# Altium PCB PCB1.PcbDoc
Units mm, origin at the board's own origin, x right, y up, seen from the top; angles counter-clockwise.
Board outline 67.31 x 69.47 mm, 2 copper layers (Top Layer, Bottom Layer); 6 components, 12 nets, 63 pads, 3 vias.
Unrouted connection lines stored in the file: 7.
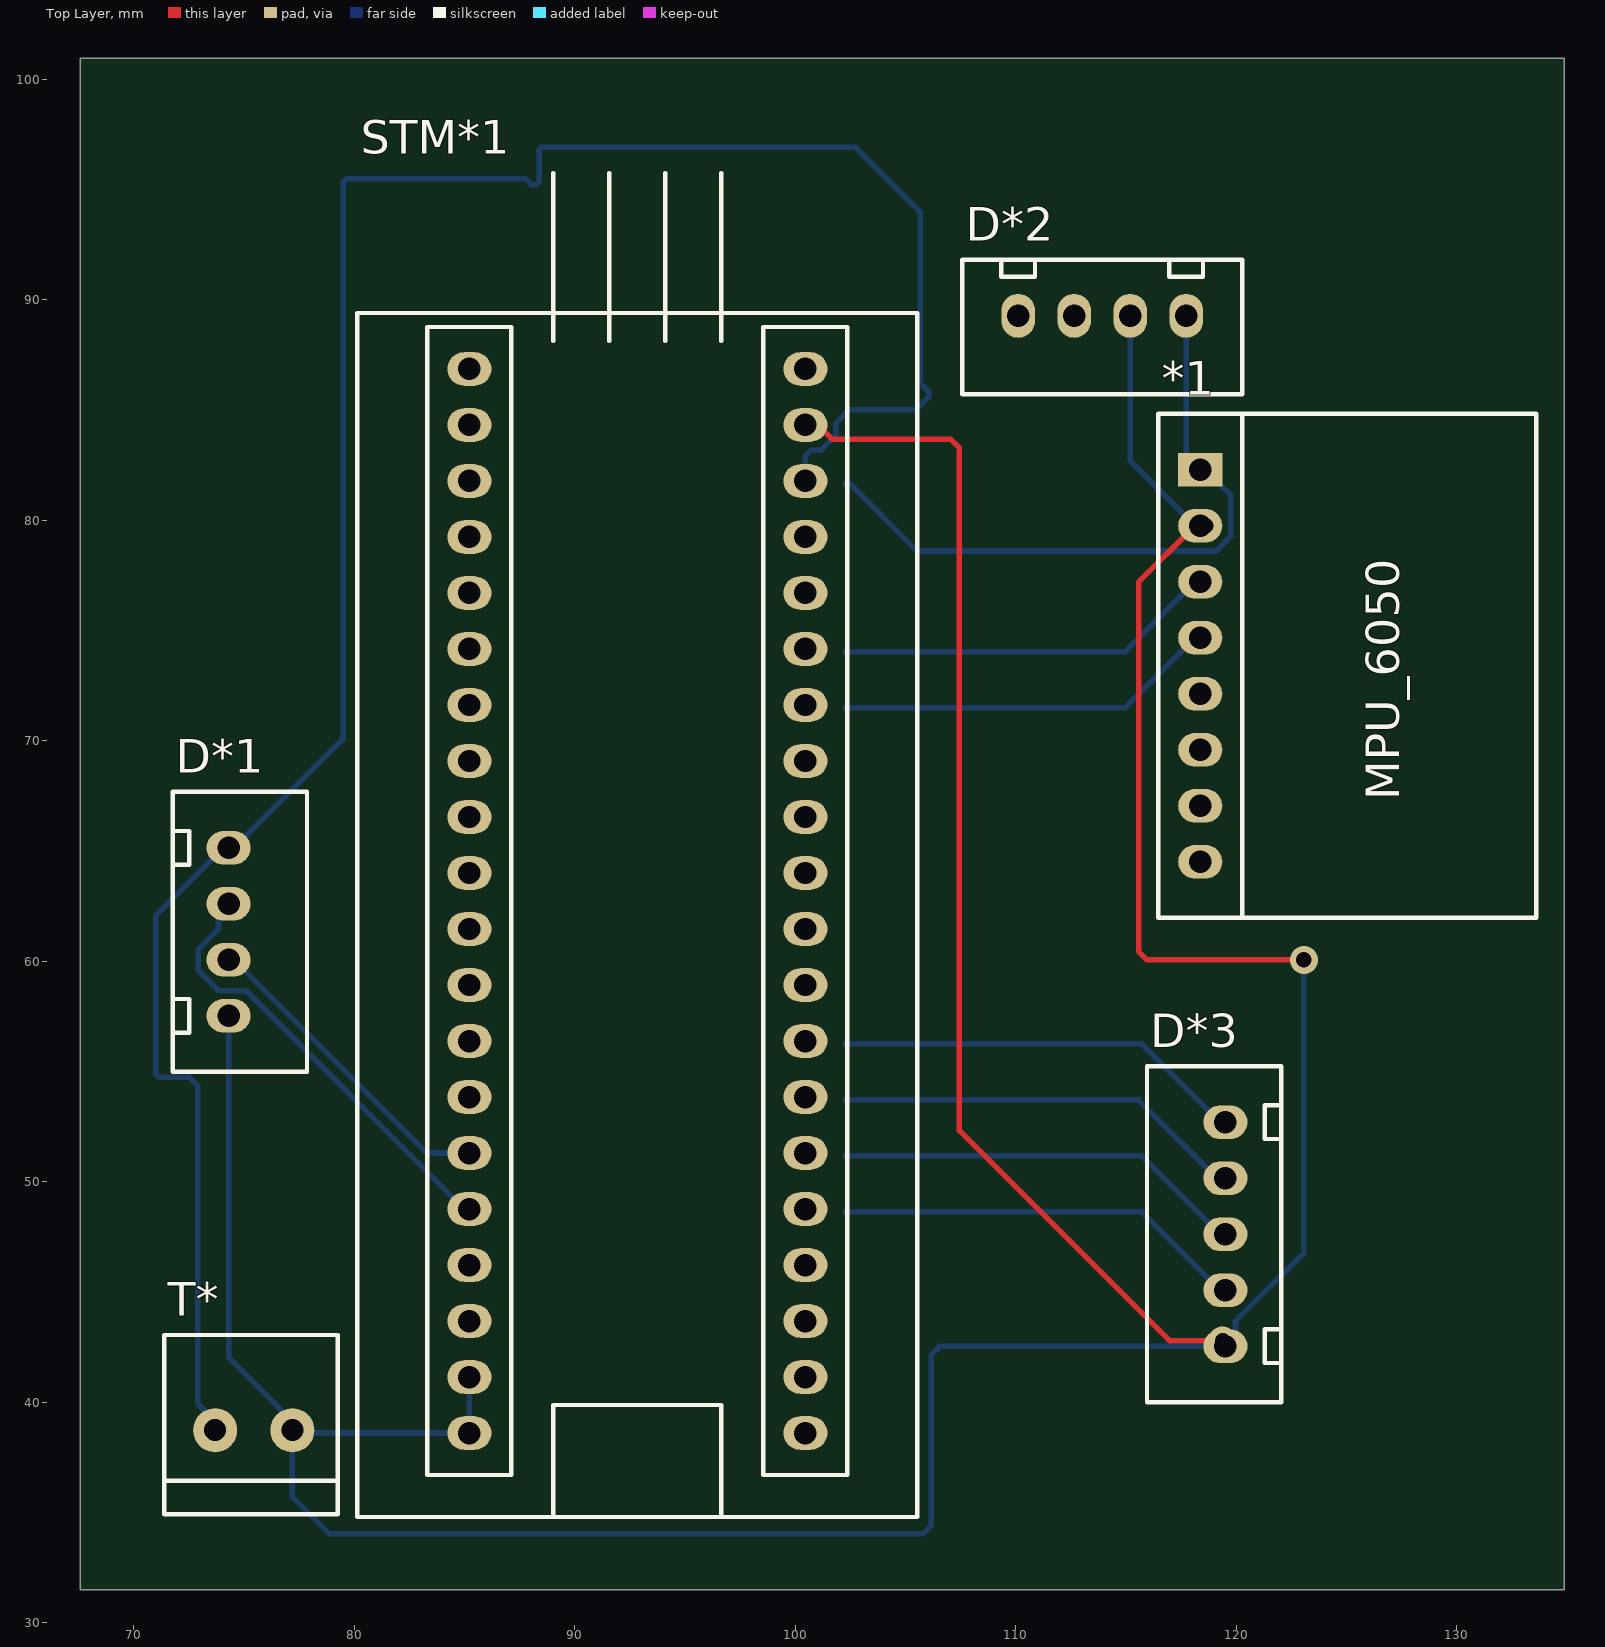
[diagram p0: Top Layer view]
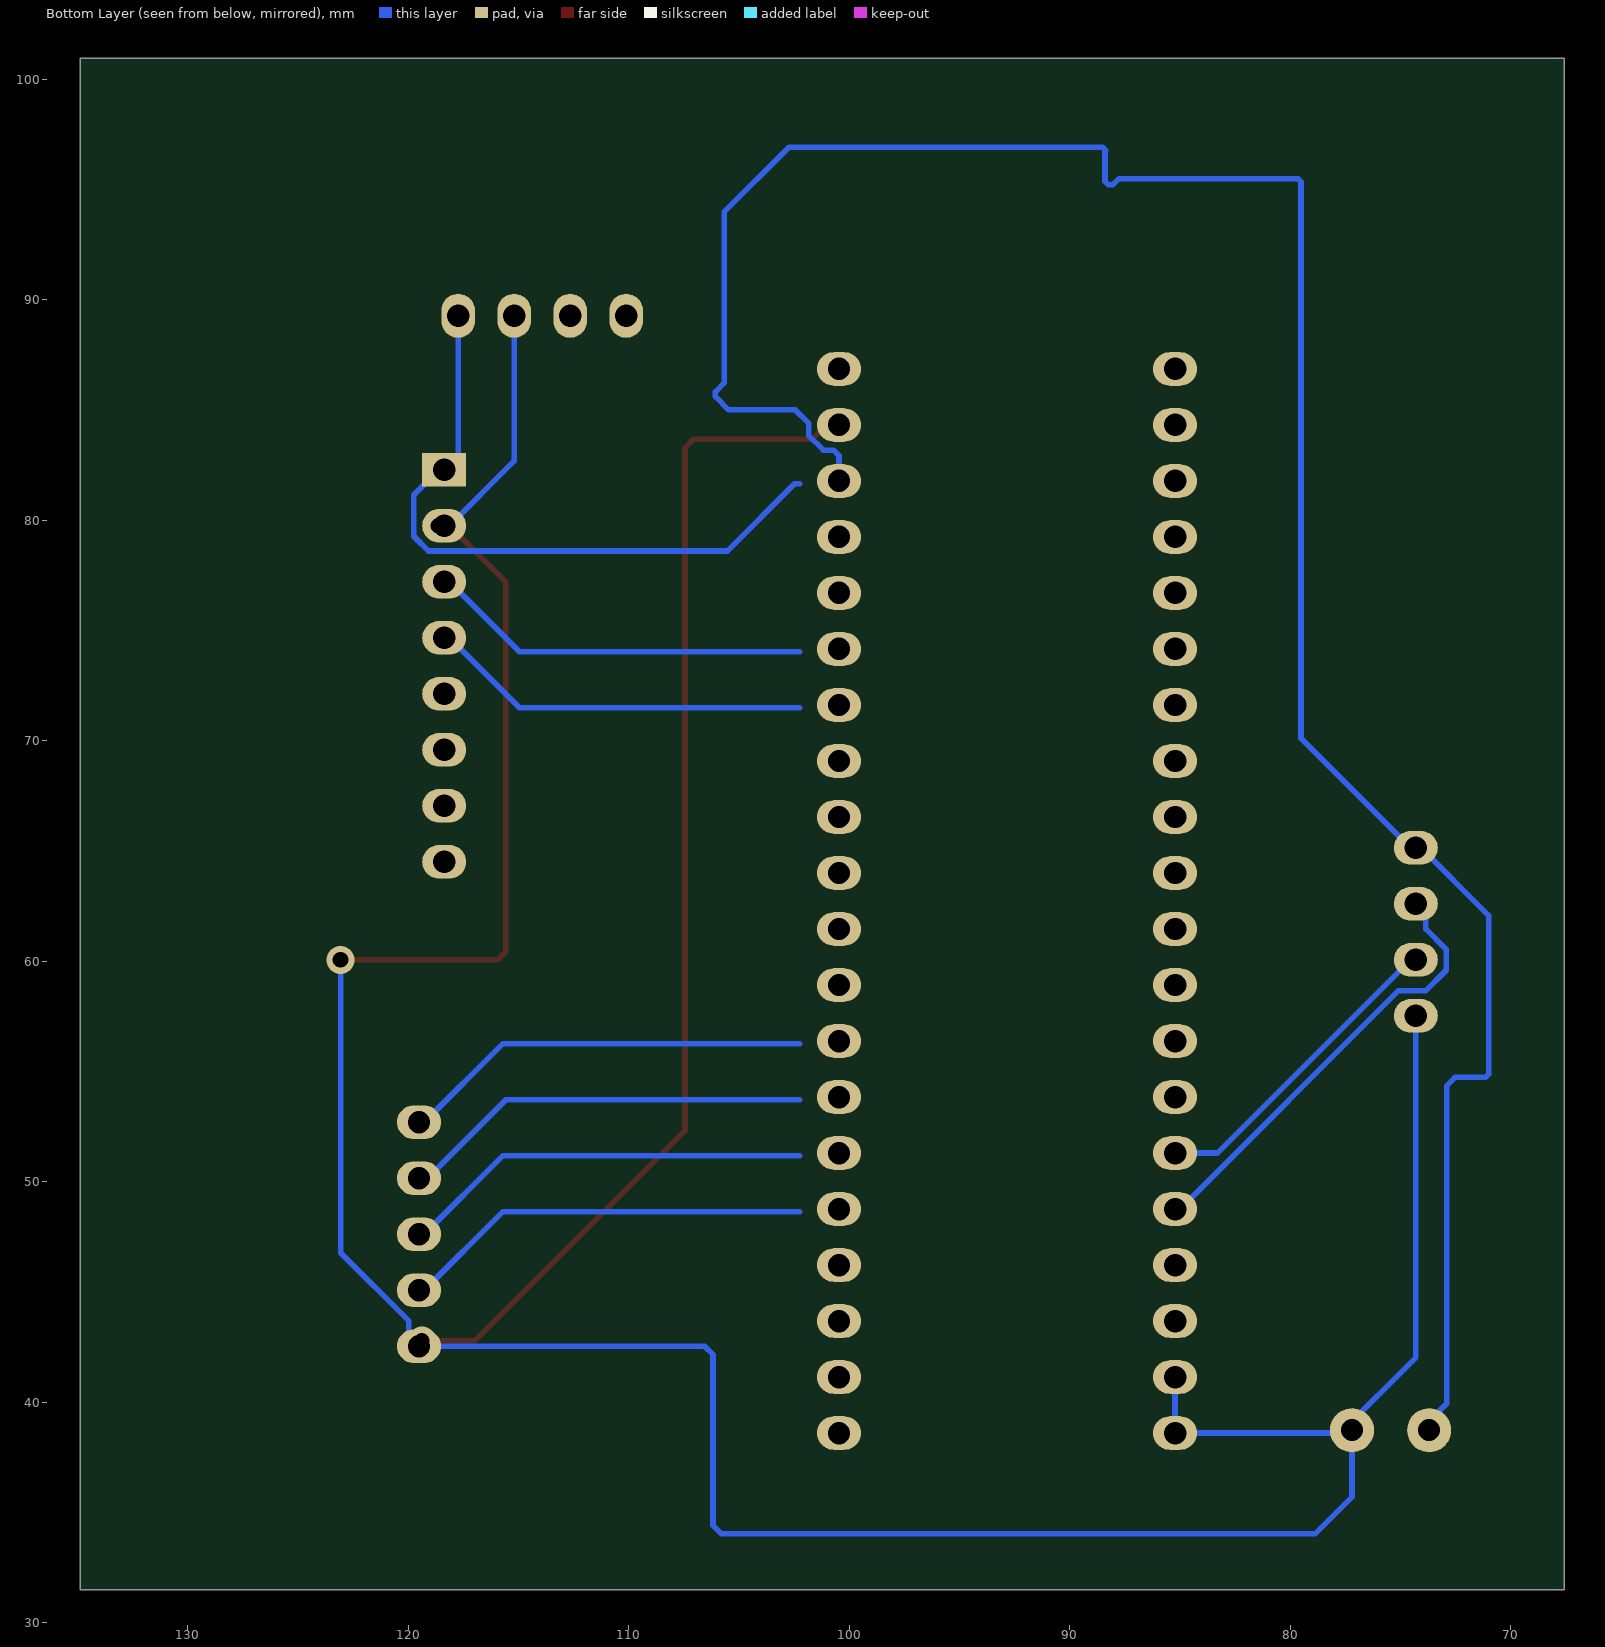
[diagram p1: Bottom Layer view, seen from below]

## Layer stack, top to bottom
Top Solder: solder mask 0.0102, Solder Resist, Dk 3.5
Top Layer: signal copper 0.0356
Dielectric 1: dielectric 0.32, FR-4, Dk 4.8
Bottom Layer: signal copper 0.0356
Bottom Solder: solder mask 0.0102, Solder Resist, Dk 3.5

## Board outline
67.564,31.496 134.874,31.496 134.874,100.965 67.564,100.965

## Design rules (kind name [scope] priority, off if disabled: settings)
Clearance [All] p1: gap=0.254 ignorepadtopadclearanceinfootprint=FALSE except(0: Arc-Hole Track-Hole SMDPad-Hole THPad-Hole Via-Hole Fill-Hole Poly-Hole Region-Hole Text-Hole)
PolygonConnect [All] p1: connectstyle=Relief reliefconductorwidth=0.254 reliefentries=4 polygonreliefangle="90 Angle" airgapwidth=0.254
RoomDefinition SchematicTask9 [InComponentClass('SchematicTask9')] p1: confinementstyle=ConfineIn formatcopy=TRUE lockcomponents=FALSE outline 190.119,28.829 266.7,28.829 266.7,92.837 190.119,92.837
RoutingVias [All] p1: holewidth=0.711 width=1.27 viastyle="Through Hole" minholewidth=0.711 minwidth=1.27 maxholewidth=0.711 maxwidth=1.27
SolderMaskExpansion [All] p1: expansion=0.102 istentingtop=FALSE
Width [All] p1: maxlimit=0.254 minlimit=0.001 preferedwidth=0.254 toplayer_minwidth=0.254 minimp=50.000000 maximp=50.000000 favimp=50.000000
30 further rules are at their usual default settings.

## Components (designator, comment, footprint, x,y, rotation, side; value= is the part's Value field where it differs from the comment)
*1 "MPU_6050" MPU6050 118.364,73.406 r90 top
D*1 "Ultrasonic_Sensor" DATA_PIN_HEADER_4_2.54m#1 74.295,61.341 r270 top
D*2 "Encoder" DATA_PIN_HEADER_4_2.54m#2 113.919,89.281 r180 top
D*3 "Cytron" DATA_PIN_HEADER_5_2.54m 119.507,47.625 r90 top
STM*1 "STM32" STM32 92.837,62.738 r90 top
T* "Terminal_block_2pins_3.5mm" Terminal_block_2pins_3.5mm 75.438,38.735 r0 top

## Footprints (in the part's own frame and the unit in brackets; to place one, negate y for a bottom-side part, rotate by r counter-clockwise, add the part's x,y. Pads: shape width x height; smd on the part's side, far side on the other; paste and mask are expansions set on the pad)
DATA_PIN_HEADER_4_2.54m#1 [mil]
  oval 60x78.74 hole 40: 1(-150,0) 2(-50,0) 4(150,0) 90(50,0)
  silkscreen extent -250,-100 250,140, body extent -244,-94 244,133, height 276
DATA_PIN_HEADER_4_2.54m#2 [mil]
  oval 60x78.74 hole 40: 1(-150,0) 2(-50,0) 3(50,0) 4(150,0)
  silkscreen extent -250,-100 250,140, body extent -244,-94 244,133, height 276
DATA_PIN_HEADER_5_2.54m [mil]
  oval 60x78.74 hole 40: 1(-200,0) 2(-100,0) 3(0,0) 4(100,0) 5(200,0)
  silkscreen extent -300,-100 300,140, body extent -293,-94 293,133, height 276
MPU6050 [mm]
  oval 1.524x2 hole 1.02: ADO(-6.35,0) GND(6.35,0) INT(-8.89,0) SCL(3.81,0) SDA(1.27,0) XCL(-3.81,0) XDA(-1.27,0)
  rect 1.524x2 hole 1.02: VCC(8.89,0)
  silkscreen extent -11.43,-15.24 11.43,1.91, body extent -10.55,-14.6 10.55,1.27, height 14.64
STM32 [mm]
  oval 1.524x2 hole 1.02: 3V3(-19.05,7.62) 3V3(24.13,-7.62) 5V(19.05,-7.62) GND(-24.13,7.62) GND(-21.59,7.62) GND(21.59,-7.62) PA_0(13.97,7.62) PA_1(11.43,7.62) PA_2(8.89,7.62) PA_3(6.35,7.62) PA_4(3.81,7.62) PA_5(1.27,7.62) PA_6(-1.27,7.62) PA_7(-3.81,7.62) PA_8(-13.97,-7.62) PA_9(-11.43,-7.62) PA_10(-8.89,-7.62) PA_11(-6.35,-7.62) PA_12(-3.81,-7.62) PA_15(-1.27,-7.62) PB-4(3.81,-7.62) PB-5(6.35,-7.62) PB_0(-6.35,7.62) PB_1(-8.89,7.62) PB_3(1.27,-7.62) PB_6(8.89,-7.62) PB_7(11.43,-7.62) PB_8(13.97,-7.62) PB_9(16.51,-7.62) PB_10(-11.43,7.62) PB_11(-13.97,7.62) PB_12(-24.13,-7.62) PB_13(-21.59,-7.62) PB_14(-19.05,-7.62) PB_15(-16.51,-7.62) PC_13(21.59,7.62) PC_14(19.05,7.62) PC_15(16.51,7.62) RES(-16.51,7.62) VBT(24.13,7.62)
  silkscreen extent -27.94,-12.7 33.02,12.7, body extent -27.33,-11.43 31.09,11.43, height 21.6
Terminal_block_2pins_3.5mm [mm]
  round 2 hole 1: 1(-1.75,0) 2(1.75,0)
  silkscreen extent -4.06,-3.81 3.81,4.32, body extent -3.93,-3.4 3.52,4, height 8.51

## Part data
D*1 D*2: library part DATA_PIN_HEADER_4_2.54m
D*3: library part DATA_PIN_HEADER_5_2.54m

## Via types
v1: diameter 1.27, hole 0.711, Top Layer to Bottom Layer, 3 vias

## Nets (pads, with @x,y where several pads share a name; then routed paths per layer and width w, separated by ;. In a path a pad name is that pad's centre, name@x,y a point inside that pad or via, vN(x,y) a via of type N, cw(c..) or ccw(c..) an arc to the next point about the centre after c; other vN are vias at no path point)
\: *1.VCC D*1.1 D*2.1 STM*1.5V T*.1 | length 138.4
  Bottom Layer w0.254: T*.1@74.097,38.735 72.898,39.934 72.898,54.356 72.517,54.737 71.142,54.737 70.993,54.886 70.993,62.087 74.057,65.151 D*1.1 74.533,65.151 79.502,70.12 79.502,95.355 79.651,95.504 87.757,95.504 88.033,95.228 88.243,95.228 88.392,95.377 88.392,96.774 88.37,96.796 88.497,96.923 102.721,96.923 105.664,93.98 105.664,86.233 106.067,85.83 106.067,85.62 105.463,85.016 102.442,85.016 101.838,84.411 101.838,83.855 101.168,83.185 100.711,83.185 100.457,82.931 STM*1.5V ; 102.235,81.661 102.473,81.661 105.521,78.613 119.075,78.613 119.745,79.283 119.745,81.153 118.602,82.296 *1.VCC 117.729,82.931 D*2.1
DR1: D*3.5 STM*1.PA_11 | length 18.7
  Bottom Layer w0.254: 102.235,56.261 115.713,56.261 119.269,52.705 D*3.5
DR2: D*3.3 STM*1.PA_9 | length 18.7
  Bottom Layer w0.254: 102.235,51.181 115.713,51.181 119.269,47.625 D*3.3
echo: D*1.90 STM*1.PB_10 | length 14.6
  Bottom Layer w0.254: D*1.90 74.533,60.071 83.296,51.308 STM*1.PB_10
encoderA: D*2.3
encoderB: D*2.4
GND: *1.GND D*1.4 D*2.2 D*3.1 STM*1.GND T*.2 | length 196
  Top Layer w0.254: STM*1.GND@100.457,84.328 101.031,84.328 101.671,83.688 107.045,83.688 107.442,83.29 107.442,52.324 116.967,42.799 118.671,42.799 118.682,42.788 119.369,42.788 v1(119.38,42.799) ; *1.GND 118.126,79.756 115.57,77.2 115.57,60.452 115.951,60.071 v1(123.063,60.071)
  Bottom Layer w0.254: D*1.4 74.295,42.037 77.724,38.608 85.217,38.608 STM*1.GND@85.217,41.148 ; T*.2 77.188,35.715 78.867,34.036 105.791,34.036 106.172,34.417 106.172,42.164 106.553,42.545 D*3.1@119.38,42.545 ; D*2.2 115.189,82.693 *1.GND@118.126,79.756 ; D*3.1@119.964,43.002 119.964,43.688 123.063,46.787 v1(123.063,60.071)
  other v1: 118.618,79.756
pwm1: D*3.4 STM*1.PA_10 | length 18.7
  Bottom Layer w0.254: 102.235,53.721 115.57,53.721 119.126,50.165 D*3.4
pwm2: D*3.2 STM*1.PA_8 | length 18.7
  Bottom Layer w0.254: 102.235,48.641 115.713,48.641 119.269,45.085 D*3.2
SCL: *1.SCL STM*1.PB_7 | length 17.4
  Bottom Layer w0.254: 102.235,74.041 114.951,74.041 118.126,77.216 *1.SCL
SDA: *1.SDA STM*1.PB_6 | length 17.4
  Bottom Layer w0.254: 102.235,71.501 114.951,71.501 118.126,74.676 *1.SDA
trig: D*1.2 STM*1.PB_11 | length 20.4
  Bottom Layer w0.254: D*1.2 73.838,62.154 73.838,61.468 72.914,60.544 72.914,59.598 73.838,58.674 75.073,58.674 84.979,48.768 STM*1.PB_11
pads on no net: *1.ADO *1.INT *1.XCL *1.XDA STM*1.3V3 STM*1.PA_0 STM*1.PA_1 STM*1.PA_2 STM*1.PA_3 STM*1.PA_4 STM*1.PA_5 STM*1.PA_6 STM*1.PA_7 STM*1.PA_12 STM*1.PA_15 STM*1.PB-4 STM*1.PB-5 STM*1.PB_0 STM*1.PB_1 STM*1.PB_3 STM*1.PB_8 STM*1.PB_9 STM*1.PB_12 STM*1.PB_13 STM*1.PB_14 STM*1.PB_15 STM*1.PC_13 STM*1.PC_14 STM*1.PC_15 STM*1.RES STM*1.VBT